# Altium PCB isa_svga.PcbDoc (part 2 of 2)
Units mm, origin at the board's own origin, x right, y up, seen from the top; angles counter-clockwise.
Board outline 104.14 x 87.63 mm, 2 copper layers (Front, Back); 62 components, 153 nets, 436 pads, 95 vias.
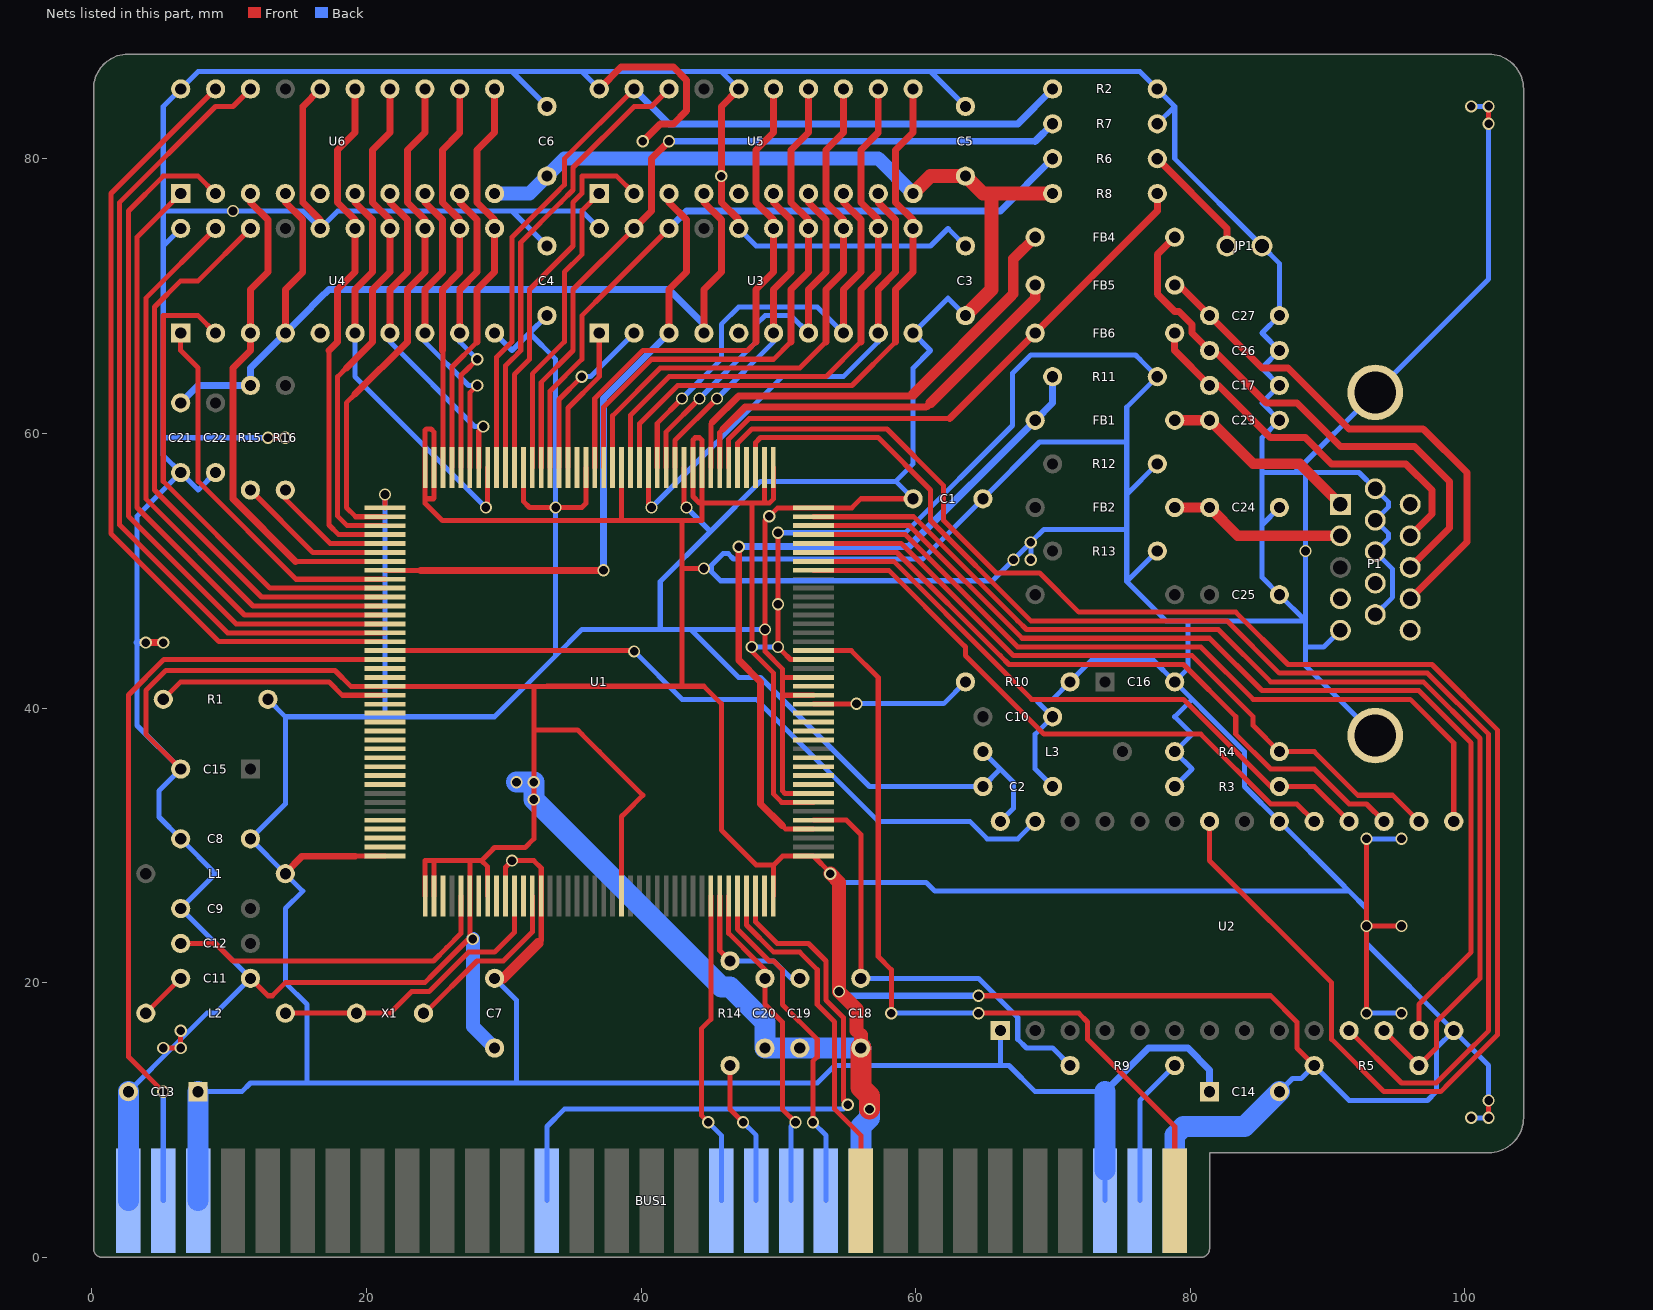
[diagram p2: the nets of this part, all layers, seen from the top]

## Via types
v1: diameter 0.889, hole 0.635, Front to Back, tented both sides, 95 vias

## Nets (pads, with @x,y where several pads share a name; then routed paths per layer and width w, separated by ;. In a path a pad name is that pad's centre, name@x,y a point inside that pad or via, vN(x,y) a via of type N, cw(c..) or ccw(c..) an arc to the next point about the centre after c; other vN are vias at no path point) (continued)
GND: BUS1.1 BUS1.10 BUS1.31 C1.2 C2.2 C3.2 C4.2 C5.2 C6.2 C7.2 C8.2 C9.2 C10.2 C11.2 C13.2 C14.2 C15.2 C16.2 C17.2 C18.2 C19.2 C20.2 C21.2 C22.2 C23.2 C24.2 C25.2 C26.2 C27.2 JP1.2 P1.5 P1.6 P1.7 P1.8 P1.10 P1.Un1 P1.Un2 R2.2 R3.2 R4.2 R5.2 R7.2 R10.2 R11.2 R12.2 R13.2 U1.1 U1.7 U1.23 U1.41 U1.42 U1.49 U1.50 U1.58 U1.79 U1.80 U1.101 U1.121 U1.122 U1.126 U1.128 U1.143 U1.160 U2.14 U2.20 U3.16 U3.20 U4.16 U4.20 U5.16 U5.20 U6.16 U6.20 | length 1092.6
  Front w0.368: v1(5.207,15.24) v1(6.477,15.24) v1(6.477,16.51) ; C15.2@6.477,35.56 3.937,38.1 3.937,41.275 5.397,42.735 17.716,42.735 18.867,41.585 U1.101@21.356,41.585 23.939,41.585 32.194,41.585 ; C11.2@11.557,20.32 12.827,19.05 13.144,19.05 14.097,20.002 24.257,20.002 24.892,20.637 27.432,23.177 v1(27.749,23.177) 27.531,23.396 U1.126@27.531,26.309 27.531,28.892 27.432,28.892 ; v1(12.827,59.69) v1(14.097,59.69) ; U1.121@24.282,26.309 24.282,28.892 24.257,28.892 24.575,28.892 24.892,28.892 ; 24.282,55.537 24.282,55.562 ; U1.122@24.933,26.309 24.933,28.892 24.892,28.892 ; U1.128@28.832,26.309 28.832,28.445 28.384,28.892 ; U1.143@38.583,26.309 38.583,31.115 38.583,31.75 38.583,32.106 38.862,32.385 40.132,33.655 36.957,36.83 35.687,38.1 35.369,38.417 32.194,38.417 ; U1.58@38.583,57.511 38.583,53.657 38.544,53.657 ; v1(44.577,50.165) 42.989,50.165 ; U1.42@48.981,57.511 48.981,54.927 49.022,54.927 ; U1.160@49.632,26.309 49.632,28.575 ; U1.41@49.632,57.511 49.632,55.22 49.34,54.927 49.022,54.927 ; v1(49.974,52.768) v1(49.974,47.561) v1(49.974,44.45) 50.292,44.133 50.889,43.536 U1.23@52.558,43.536 ; U1.7@52.558,33.137 50.249,33.137 49.657,33.729 49.657,42.545 48.387,43.815 48.069,44.133 v1(48.069,44.45) 48.069,53.657 48.069,54.927 ; v1(53.785,27.94) 53.785,28.009 U1.1@52.558,29.235 50.317,29.235 49.657,28.575 49.632,28.575 ; v1(64.579,19.05) 85.852,19.05 87.757,17.145 87.757,15.24 R5.2@89.027,13.97 ; v1(92.837,17.78) 92.837,22.86 v1(92.837,30.48) ; v1(92.837,24.13) v1(95.377,24.13) ; v1(101.727,10.16) v1(101.727,11.43) ; v1(101.727,82.55) v1(101.727,83.82) ; 24.282,55.245 24.282,54.902 25.527,53.657 37.592,53.657 38.544,53.657 ; 24.282,55.245 24.282,55.562 ; 24.282,55.245 24.892,55.245 24.933,55.286 24.933,55.603 U1.79@24.933,57.511 24.933,60.094 24.701,60.325 24.371,60.325 24.282,60.236 U1.80@24.282,57.511 24.282,55.562 ; 24.892,28.892 27.432,28.892 ; 27.432,28.892 28.384,28.892 ; 28.384,28.892 29.019,29.527 29.337,29.845 31.559,29.845 32.194,30.48 32.194,33.655 32.194,34.925 32.194,38.417 ; 32.194,38.417 32.194,40.005 32.194,41.585 ; 32.194,41.585 33.139,41.585 33.147,41.593 42.989,41.593 ; 38.544,53.657 42.989,53.657 ; 42.989,41.593 44.577,41.593 45.847,40.322 45.847,31.115 48.387,28.575 49.632,28.575 ; 42.989,41.593 42.989,50.165 ; 42.989,50.165 42.989,51.435 42.989,53.657 ; 42.989,53.657 44.259,53.657 44.432,53.657 44.432,55.245 ; 44.432,55.245 U1.49@44.432,57.511 44.432,59.517 44.259,59.69 43.942,59.69 43.782,59.53 U1.50@43.782,57.511 43.782,55.405 44.259,54.927 44.577,54.927 ; 44.432,55.245 44.432,54.927 44.577,54.927 ; 44.577,54.927 45.212,54.927 48.069,54.927 ; 48.069,54.927 48.387,54.927 49.022,54.927
  Front w0.505: v1(3.937,44.767) v1(5.207,44.767) ; U4.16@16.637,74.93 16.637,75.565 15.367,76.835 15.367,83.82 U6.16@16.637,85.09 ; U5.20@36.957,85.09 38.544,86.677 42.355,86.677 43.307,85.725 43.307,83.502 42.355,82.55 41.402,82.55 v1(40.132,81.28) ; U3.16@47.117,74.93 47.117,75.565 45.847,76.835 v1(45.847,78.74) 45.847,83.82 U5.16@47.117,85.09
  Front w0.762: 55.689,16.51 56.007,16.192
  Front w1.016: v1(53.785,27.94) 54.419,27.305 v1(54.419,19.367) 55.689,18.098 55.689,16.51 ; C18.2@56.007,15.24 56.007,16.192
  Front w1.524: C18.2@56.007,15.24 56.007,12.383 56.642,11.747 56.642,11.43 v1(56.642,10.795)
  Back w0.368: C13.2@2.667,12.065 6.159,15.557 ; v1(6.477,15.24) 6.159,15.557 ; U4.20@6.477,74.93 5.207,73.66 5.207,73.343 ; C22.2@9.017,57.15 7.747,55.88 C21.2@6.477,57.15 ; v1(12.827,59.69) 5.207,59.69 ; C4.2@33.147,73.66 30.607,76.2 ; C6.2@33.147,83.82 30.607,86.36 ; U3.20@36.957,74.93 35.687,76.2 30.607,76.2 ; U5.20@36.957,85.09 35.687,86.36 ; v1(44.577,50.165) 45.148,50.165 v1@44.895,50.165 ; U3.16@47.117,74.93 48.387,73.66 60.452,73.66 60.77,73.66 61.087,73.66 62.357,74.93 62.517,74.77 C3.2@63.627,73.66 ; U5.16@47.117,85.09 45.847,86.36 ; v1(48.069,44.45) v1(49.974,44.45) ; v1(49.974,52.768) 59.245,52.768 67.056,60.579 67.056,64.389 68.389,65.722 76.01,65.722 76.327,65.405 R11.2@77.597,64.135 75.374,61.912 75.374,59.372 ; v1(53.785,27.94) 54.419,27.305 54.742,27.305 ; 54.737,27.31 54.742,27.305 ; C5.2@63.627,83.82 61.087,86.36 ; v1(68.389,50.8) v1(68.389,52.07) ; C2.2@69.977,34.29 68.707,35.56 68.707,38.1 C10.2@69.977,39.37 69.025,40.322 68.707,40.64 69.977,40.64 R10.2@71.247,41.91 72.834,43.497 77.279,43.497 C16.2@78.867,41.91 ; R13.2@77.597,51.435 75.374,49.212 ; R12.2@77.597,57.785 75.374,55.562 ; R7.2@77.597,82.55 78.867,83.82 ; R3.2@78.867,34.29 80.137,35.56 R4.2@78.867,36.83 80.137,38.1 78.867,39.37 80.137,40.64 ; C14.2@86.487,12.065 87.439,13.018 88.075,13.018 R5.2@89.027,13.97 91.567,11.43 97.282,11.43 97.917,12.065 97.917,15.24 U2.14@99.187,16.51 ; C24.2@86.487,54.61 85.217,53.34 ; P1.5@90.932,45.664 89.718,44.45 88.392,44.45 ; v1(92.837,17.78) v1(95.377,17.78) ; P1.Un1@93.472,38.001 88.392,43.081 88.392,44.45 ; P1.10@93.472,46.81 94.742,48.08 94.742,50.119 P1.8@93.472,51.389 94.424,52.342 94.424,52.728 P1.7@93.472,53.68 94.424,54.633 94.424,55.019 P1.6@93.472,55.971 92.293,57.15 88.392,57.15 ; P1.Un2@94.292,61.719 P1.Un2@94.292,62.415 ; v1(95.377,30.48) v1(92.837,30.48) 92.837,25.4 ; v1(100.457,10.16) v1(101.727,10.16) ; v1(100.457,83.82) v1(101.727,83.82) ; v1(101.727,11.43) 101.727,13.97 U2.14@99.187,16.51 ; v1(101.727,82.55) 101.727,71.244 P1.Un2@93.472,62.989 87.633,57.15 ; 5.207,59.69 5.207,73.343 ; 5.207,59.69 5.207,58.42 C21.2@6.477,57.15 ; 5.207,73.343 5.207,76.2 ; 5.207,76.2 v1(10.287,76.2) 15.367,76.2 U4.16@16.637,74.93 17.907,76.2 30.607,76.2 ; 5.207,76.2 5.207,83.82 U6.20@6.477,85.09 7.747,86.36 30.607,86.36 ; 6.159,15.557 8.382,17.78 9.017,17.78 C11.2@11.557,20.32 C9.2@6.477,25.4 8.7,27.622 9.017,27.94 C8.2@6.477,30.48 4.889,32.067 4.889,33.972 C15.2@6.477,35.56 3.302,38.735 3.302,44.767 3.302,45.72 3.302,53.975 C21.2@6.477,57.15 ; 30.607,86.36 35.687,86.36 ; 35.687,86.36 45.847,86.36 ; 45.847,86.36 60.77,86.36 61.087,86.36 ; 54.742,27.305 59.182,27.305 60.77,27.305 61.404,26.67 91.567,26.67 ; 61.087,86.36 76.327,86.36 R2.2@77.597,85.09 78.867,83.82 ; v1(68.389,52.07) 69.342,53.023 75.374,53.023 ; v1(68.389,52.07) 68.072,51.752 67.437,51.117 v1(67.12,50.8) 65.596,49.276 45.783,49.276 45.148,49.911 45.148,50.419 45.974,51.244 46.355,51.244 46.736,50.863 60.515,50.863 C1.2@64.897,55.245 69.025,59.372 75.374,59.372 ; 75.374,49.212 75.374,53.023 ; 75.374,49.212 78.232,46.355 79.819,46.355 ; 75.374,53.023 75.374,55.562 ; 75.374,55.562 75.374,59.055 75.374,59.372 ; C16.2@78.867,41.91 79.819,42.862 79.819,46.355 ; C16.2@78.867,41.91 80.137,40.64 ; 78.867,83.82 78.867,80.01 JP1.2@85.217,73.66 86.487,72.39 C27.2@86.487,68.58 85.217,67.31 C26.2@86.487,66.04 85.217,64.77 C17.2@86.487,63.5 85.217,62.23 C23.2@86.487,60.96 85.217,59.69 ; 79.819,46.355 82.677,46.355 88.392,46.355 ; 80.137,40.64 81.407,39.37 83.947,36.83 83.947,34.29 U2.20@86.487,31.75 90.932,27.305 91.567,26.67 ; 85.217,53.34 85.217,59.69 ; 85.217,53.34 85.217,49.53 C25.2@86.487,48.26 88.392,46.355 ; 85.217,59.69 85.217,57.15 87.633,57.15 ; 87.633,57.15 88.392,57.15 ; 88.392,44.45 88.392,46.355 ; 88.392,46.355 v1(88.392,51.435) 88.392,57.15 ; 91.567,26.67 92.837,25.4 ; 92.837,25.4 v1(92.837,24.13) 92.837,22.86 U2.14@99.187,16.51
  Back w0.505: 3.302,44.767 v1(3.937,44.767) ; v1(54.419,19.367) 54.737,19.05 v1(64.579,19.05)
  Back w1.016: v1(27.749,23.177) 27.749,16.828 C7.2@29.337,15.24
  Back w1.524: BUS1.31@2.667,4.127 C13.2@2.667,12.065 ; v1(30.924,34.608) v1(32.194,34.608) v1(32.194,33.337) 45.847,19.685 46.482,19.685 49.022,17.145 C20.2@49.022,15.24 C19.2@51.562,15.24 C18.2@56.007,15.24 ; BUS1.10@56.007,4.127 56.007,9.525 56.642,10.16 v1(56.642,10.795) ; BUS1.1@78.867,4.127 78.867,8.89 79.502,9.525 83.947,9.525 C14.2@86.487,12.065
GREEN: C24.1 FB2.2 P1.2 | length 12.9
  Front w0.762: FB2.2@78.867,54.61 C24.1@81.407,54.61 83.472,52.545 P1.2@90.932,52.545
HSYNC: FB4.2 U1.48 | length 33.9
  Front w0.368: U1.48@45.082,57.511 45.082,60.703 45.209,60.83
  Front w0.508: 45.209,60.83 47.117,62.738 59.182,62.738 59.69,62.738 59.817,62.865
  Front w0.762: 59.817,62.865 66.962,70.01 67.12,70.168 67.12,72.707 FB4.2@68.707,74.295
I\O\R\: BUS1.14 U1.153 | length 23.1
  Front w0.368: 44.42,16.67 44.42,16.675 ; v1(44.895,9.842) 44.42,10.317 44.42,16.51 44.42,16.675 ; U1.153@45.082,26.309 45.082,17.338 44.42,16.675
  Back w0.368: v1(44.895,9.842) 45.847,8.89 BUS1.14@45.847,4.127
I\O\W\: BUS1.13 R14.1 | length 10.6
  Front w0.368: R14.1@46.482,13.97 46.482,10.795 v1(47.434,9.842)
  Back w0.368: v1(47.434,9.842) 48.387,8.89 BUS1.13@48.387,4.127
IOCHRDY: BUS1.41 U1.157 | length 26.7
  Front w0.368: U1.157@47.681,26.309 47.681,24.201 49.657,22.225 51.562,22.225 52.832,20.955 52.832,18.415 54.102,17.145 54.102,17.14 54.102,10.795 56.007,8.89 BUS1.41@56.007,4.127
M\E\M\R\: BUS1.12 C20.1 U1.155 | length 24.3
  Front w0.368: U1.155@46.383,26.309 46.383,23.594 48.387,21.59 49.022,20.955 C20.1@49.022,20.32 49.022,18.415 50.292,17.145 50.292,10.795 v1(51.244,9.842)
  Back w0.368: BUS1.12@50.927,4.127 50.927,9.525 v1(51.244,9.842)
M\E\M\W\: BUS1.11 U1.156 | length 25.3
  Front w0.368: U1.156@47.031,26.309 47.031,23.899 49.34,21.59 49.657,21.59 50.292,20.955 50.292,18.415 52.832,15.875 52.832,14.922 52.832,14.605 52.514,14.287 v1(52.514,9.842)
  Back w0.368: v1(52.514,9.842) 53.467,8.89 BUS1.11@53.467,4.127
MAA0: U1.52 U3.6 U5.6 | length 24
  Front w0.368: U1.52@42.481,57.511 42.481,59.499 v1(45.529,62.547)
  Front w0.505: U3.6@49.657,67.31 49.657,70.485 50.927,71.755 50.927,75.565 49.657,76.835 U5.6@49.657,77.47
  Back w0.368: v1(45.529,62.547) 49.657,66.675 U3.6@49.657,67.31
MAA1: U1.53 U3.7 U5.7 | length 29
  Front w0.368: U1.53@41.831,57.511 41.831,60.119 v1(44.259,62.547)
  Front w0.505: U3.7@52.197,67.31 52.197,70.485 53.467,71.755 53.467,75.565 52.197,76.835 U5.7@52.197,77.47
  Back w0.368: v1(44.259,62.547) 48.387,66.675 48.387,67.945 49.022,68.58 50.927,68.58 U3.7@52.197,67.31
MAA2: U1.54 U3.8 U5.8 | length 33.8
  Front w0.368: U1.54@41.181,57.511 41.181,60.739 v1(42.989,62.547)
  Front w0.505: U3.8@54.737,67.31 54.737,70.485 56.007,71.755 56.007,75.565 54.737,76.835 U5.8@54.737,77.47
  Back w0.368: v1(42.989,62.547) 45.847,65.405 45.847,67.945 47.117,69.215 52.832,69.215 U3.8@54.737,67.31
MAA3: U1.55 U3.9 U5.9 | length 36.4
  Front w0.368: U1.55@40.533,57.511 40.533,54.844 v1(40.767,54.61)
  Front w0.505: U3.9@57.277,67.31 57.277,70.485 58.547,71.755 58.547,75.565 57.277,76.835 U5.9@57.277,77.47
  Back w0.368: v1(40.767,54.61) 50.292,64.135 54.737,64.135 57.277,66.675 U3.9@57.277,67.31
MAA4: U1.56 U3.11 U5.11 | length 44.3
  Front w0.368: U1.56@39.883,57.511 39.883,60.711 42.672,63.5 52.832,63.5 55.372,63.5 58.547,66.675
  Front w0.505: 58.547,66.675 58.547,70.485 59.817,71.755 U3.11@59.817,74.93 59.817,75.565 58.547,76.835 58.547,80.645 59.817,81.915 U5.11@59.817,85.09
MAA5: U1.57 U3.12 U5.12 | length 42.8
  Front w0.368: U1.57@39.233,57.511 39.233,61.331 42.037,64.135 50.927,64.135 53.467,64.135 56.007,66.675
  Front w0.505: 56.007,66.675 56.007,70.485 57.277,71.755 U3.12@57.277,74.93 57.277,75.565 56.007,76.835 56.007,80.645 57.277,81.915 U5.12@57.277,85.09
MAA6: U1.59 U3.13 U5.13 | length 41.5
  Front w0.368: U1.59@37.932,57.511 37.932,61.3 41.402,64.77 49.022,64.77 51.562,64.77 53.467,66.675
  Front w0.505: 53.467,66.675 53.467,70.485 54.737,71.755 U3.13@54.737,74.93 54.737,75.565 53.467,76.835 53.467,80.645 54.737,81.915 U5.13@54.737,85.09
MAA7: U1.60 U3.14 U5.14 | length 40
  Front w0.368: U1.60@37.282,57.511 37.282,61.92 40.767,65.405 47.117,65.405 49.657,65.405 50.927,66.675
  Front w0.505: 50.927,66.675 50.927,70.485 52.197,71.755 U3.14@52.197,74.93 52.197,75.565 50.927,76.835 50.927,80.645 52.197,81.915 U5.14@52.197,85.09
MAA8: U1.61 U3.15 U5.15 | length 38.5
  Front w0.368: U1.61@36.632,57.511 36.632,62.54 40.132,66.04 47.752,66.04 48.387,66.675
  Front w0.505: 48.387,66.675 48.387,70.485 49.657,71.755 U3.15@49.657,74.93 49.657,75.565 48.387,76.835 48.387,80.645 49.657,81.915 U5.15@49.657,85.09
MAB0: U1.73 U4.6 U6.6 | length 30.8
  Front w0.368: v1(28.702,54.61) 28.832,54.74 U1.73@28.832,57.511
  Front w0.505: U4.6@19.177,67.31 19.177,70.485 20.447,71.755 20.447,75.565 19.177,76.835 U6.6@19.177,77.47
  Back w0.368: U4.6@19.177,67.31 19.177,64.135 v1(28.702,54.61)
MAB1: U1.74 U4.7 U6.7 | length 24.3
  Front w0.368: U1.74@28.181,57.511 28.181,60.185 v1(28.511,60.515)
  Front w0.505: U4.7@21.717,67.31 21.717,70.485 22.987,71.755 22.987,75.565 21.717,76.835 U6.7@21.717,77.47
  Back w0.368: U4.7@21.717,67.31 21.717,66.675 27.877,60.515 v1(28.511,60.515)
MAB2: U1.75 U4.8 U6.8 | length 23.2
  Front w0.368: U1.75@27.531,57.511 27.531,62.964 v1(28.067,63.5)
  Front w0.505: U4.8@24.257,67.31 24.257,70.485 25.527,71.755 25.527,75.565 24.257,76.835 U6.8@24.257,77.47
  Back w0.368: U4.8@24.257,67.31 24.257,66.675 27.432,63.5 v1(28.067,63.5)
MAB3: U1.76 U4.9 U6.9 | length 22
  Front w0.368: U1.76@26.881,57.511 26.881,64.219 27.432,64.77 27.749,65.087 v1(28.067,65.405)
  Front w0.505: U4.9@26.797,67.31 26.797,70.485 28.067,71.755 28.067,75.565 26.797,76.835 U6.9@26.797,77.47
  Back w0.368: U4.9@26.797,67.31 26.797,66.675 v1(28.067,65.405)
MAB4: U1.77 U4.11 U6.11 | length 29.9
  Front w0.368: U1.77@26.233,57.511 26.233,64.841 28.067,66.675
  Front w0.505: 28.067,66.675 28.067,70.485 29.337,71.755 29.337,73.025 U4.11@29.337,74.93 29.337,75.565 28.067,76.835 28.067,80.645 29.337,81.915 U6.11@29.337,85.09
MAB5: U1.78 U4.12 U6.12 | length 29.2
  Front w0.368: 25.527,66.04 25.583,65.984 U1.78@25.583,57.511
  Front w0.505: 25.527,66.04 25.527,70.485 26.797,71.755 U4.12@26.797,74.93 26.797,75.565 25.527,76.835 25.527,80.645 26.797,81.915 U6.12@26.797,85.09
MAB6: U1.82 U4.13 U6.13 | length 37
  Front w0.368: 19.177,62.865 18.542,62.23 18.542,60.96 18.542,54.61 19.218,53.934 U1.82@21.356,53.934
  Front w0.505: 19.177,62.865 22.987,66.675 22.987,70.485 24.257,71.755 U4.13@24.257,74.93 24.257,75.565 22.987,76.835 22.987,80.645 24.257,81.915 U6.13@24.257,85.09
MAB7: U1.83 U4.14 U6.14 | length 37.5
  Front w0.368: 18.542,64.77 17.907,64.135 17.907,62.865 17.907,53.975 18.598,53.284 U1.83@21.356,53.284
  Front w0.505: 18.542,64.77 20.447,66.675 20.447,70.485 21.717,71.755 U4.14@21.717,74.93 21.717,75.565 20.447,76.835 20.447,80.645 21.717,81.915 U6.14@21.717,85.09
MAB8: U1.84 U4.15 U6.15 | length 38
  Front w0.368: 17.272,66.04 17.272,53.34 17.978,52.634 U1.84@21.356,52.634
  Front w0.505: 17.272,66.04 17.907,66.675 17.907,70.485 19.177,71.755 U4.15@19.177,74.93 19.177,75.565 17.907,76.835 17.907,80.645 19.177,81.915 U6.15@19.177,85.09
MD0: U1.64 U3.1 | length 10.7
  Front w0.368: U1.64@34.681,57.511 34.681,59.69 34.681,59.954 34.681,61.595 34.681,61.859 36.957,64.135 36.957,65.405 U3.1@36.957,67.31
MD1: U1.65 U3.2 | length 12.4
  Front w0.368: U1.65@34.031,57.511 34.031,60.325 34.031,61.595 34.031,62.479 v1(35.687,64.135)
  Back w0.368: v1(35.687,64.135) 36.322,64.135 37.592,65.405 U3.2@39.497,67.31
MD2: R6.1 U1.66 U3.18 | length 51
  Front w0.368: U1.66@33.381,57.511 33.381,60.325 33.381,60.96 33.381,62.23 33.381,63.099 35.687,65.405 35.687,66.675 35.687,67.31 35.687,68.58 37.592,70.485 U3.18@42.037,74.93
  Back w0.505: U3.18@42.037,74.93 43.307,76.2 66.167,76.2
  Back w0.508: 66.167,76.2 R6.1@69.977,80.01
MD3: R7.1 U1.67 U3.19 | length 56.1
  Front w0.368: U1.67@32.733,57.511 32.733,61.595 32.733,62.865 32.733,63.721 35.052,66.04 35.052,67.31 35.052,70.485 U3.19@39.497,74.93
  Front w0.505: U3.19@39.497,74.93 40.767,76.2 40.767,80.01 v1(42.037,81.28)
  Back w0.505: v1(42.037,81.28) 68.707,81.28
  Back w0.508: 68.707,81.28 R7.1@69.977,82.55
MD4: U1.68 U5.1 | length 22
  Front w0.368: U1.68@32.083,57.511 32.083,63.5 32.083,64.341 34.417,66.675 34.417,67.945 34.417,71.755 35.687,73.025 35.687,74.295 35.687,75.565 35.687,76.2 U5.1@36.957,77.47
MD5: U1.70 U5.2 | length 27.6
  Front w0.368: U1.70@30.782,57.511 30.782,61.595 30.782,62.23 30.782,62.865 30.782,64.31 31.242,64.77 31.877,65.405 31.877,66.675 31.877,70.485 35.052,73.66 35.052,74.93 35.052,76.835 35.687,77.47 35.687,78.74 38.227,78.74 U5.2@39.497,77.47
MD6: U1.71 U5.18 | length 33.3
  Front w0.368: U1.71@30.132,57.511 30.132,62.865 30.132,64.135 30.132,64.93 30.607,65.405 30.612,65.405 31.242,66.035 31.242,72.39 31.242,73.66 31.242,73.914 34.163,76.835 35.052,77.724 35.052,79.375 39.497,83.82 40.767,83.82 U5.18@42.037,85.09
MD7: R2.1 U1.72 U5.19 | length 64.3
  Front w0.368: U1.72@29.482,57.511 29.482,64.77 29.482,65.55 30.607,66.675 30.607,73.025 30.607,74.295 33.782,77.47 34.417,78.105 34.417,80.01 U5.19@39.497,85.09
  Back w0.505: U5.19@39.497,85.09 42.037,82.55 67.437,82.55
  Back w0.508: 67.437,82.55 R2.1@69.977,85.09
MD16: U1.89 U4.1 | length 27.9
  Front w0.368: U4.1@6.477,67.31 6.477,66.04 7.747,64.77 7.747,56.515 14.877,49.385 U1.89@21.356,49.385
MD17: U1.90 U4.2 | length 35.8
  Front w0.368: U4.2@9.017,67.31 7.747,68.58 5.207,68.58 5.207,56.515 12.987,48.735 U1.90@21.356,48.735
MD18: U1.91 U4.18 | length 42.7
  Front w0.368: U4.18@11.557,74.93 7.747,71.12 6.477,71.12 4.572,69.215 4.572,55.88 12.367,48.085 U1.91@21.356,48.085
MD19: U1.92 U4.19 | length 42.4
  Front w0.368: U4.19@9.017,74.93 3.937,69.85 3.937,55.245 11.747,47.434 U1.92@21.356,47.434
MD20: U1.93 U6.1 | length 45.5
  Front w0.368: U6.1@6.477,77.47 3.302,74.295 3.302,54.61 11.128,46.784 U1.93@21.356,46.784
MD21: U1.94 U6.2 | length 52.1
  Front w0.368: U6.2@9.017,77.47 7.747,78.74 5.207,78.74 2.667,76.2 2.667,53.975 10.508,46.134 U1.94@21.356,46.134
MD22: U1.95 U6.18 | length 59
  Front w0.368: U6.18@11.557,85.09 10.287,83.82 9.017,83.82 2.032,76.835 2.032,53.34 9.888,45.484 U1.95@21.356,45.484
MD23: U1.96 U6.19 | length 58.8
  Front w0.368: U6.19@9.017,85.09 1.397,77.47 1.397,52.705 9.266,44.836 U1.96@21.356,44.836
MONITOR: FB6.2 R8.1 U1.46 | length 41.4
  Front w0.368: U1.46@46.383,57.511 46.383,59.591 47.117,60.325 47.434,60.642 47.879,61.087 62.484,61.087
  Front w0.508: 62.484,61.087 FB6.2@68.707,67.31 77.597,76.2 R8.1@77.597,77.47
N\M\I\: BUS1.32 U1.24 | length 60.6
  Front w0.368: U1.24@52.558,44.186 54.102,44.186 55.319,44.186 57.277,42.227 57.277,21.907 58.229,20.955 v1(58.229,17.78) ; v1(64.579,17.78) 71.882,17.78 72.517,17.145 72.517,15.875 78.867,9.525 BUS1.32@78.867,4.127
  Back w0.368: v1(58.229,17.78) v1(64.579,17.78)
Net-(C11-Pad1): C11.1 L2.1 | length 3.6
  Front w0.368: L2.1@3.937,17.78 C11.1@6.477,20.32
Net-(C12-Pad2): C12.2 U1.125 | length 24.5
  Front w0.368: C12.2@6.477,22.86 9.017,22.86 10.287,21.59 24.892,21.59 25.85,22.548 26.881,23.579 U1.125@26.881,26.309
Net-(C17-Pad1): C17.1 FB6.1 P1.12 | length 28.2
  Front w0.508: FB6.1@78.867,67.31 78.867,66.04 C17.1@81.407,63.5 82.042,63.5 85.852,59.69 88.392,59.69 90.297,57.785 95.694,57.785 97.599,55.88 97.599,54.292 97.599,54.132 P1.12@96.012,52.545
Net-(C18-Pad1): C18.1 R9.2 U1.5 | length 33.2
  Front w0.368: U1.5@52.558,31.836 54.737,31.836 54.968,31.836 56.007,30.797 C18.1@56.007,20.32
  Back w0.368: C18.1@56.007,20.32 64.579,20.32 67.437,17.462 67.437,15.875 68.072,15.24 69.342,15.24 69.977,15.24 R9.2@71.247,13.97
Net-(C19-Pad1): C19.1 R14.2 U1.154 | length 10.6
  Front w0.368: U1.154@45.733,26.309 45.733,22.339 R14.2@46.482,21.59
  Back w0.368: R14.2@46.482,21.59 49.657,21.59 50.927,20.32 C19.1@51.562,20.32
Net-(C26-Pad1): C26.1 FB4.1 P1.13 | length 39.4
  Front w0.508: FB4.1@78.867,74.295 77.597,73.025 77.597,70.168 78.867,68.897 79.184,68.897 80.137,67.945 80.137,67.31 80.772,66.675 C26.1@81.407,66.04 81.724,66.04 85.534,62.23 87.757,62.23 90.932,59.055 96.329,59.055 98.87,56.515 98.87,53.104 P1.13@96.012,50.246
Net-(C27-Pad1): C27.1 FB5.1 P1.14 | length 37.8
  Front w0.508: FB5.1@78.867,70.802 79.184,70.802 C27.1@81.407,68.58 85.217,64.77 87.122,64.77 91.567,60.325 96.965,60.325 100.139,57.15 100.139,52.083 P1.14@96.012,47.955
Net-(JP1-Pad1): JP1.1 R6.2 | length 8.5
  Front w0.508: R6.2@77.597,80.01 82.677,74.93 JP1.1@82.677,73.66
Net-(L2-Pad2): L2.2 U1.131 X1.2 | length 21.8
  Front w0.368: L2.2@14.097,17.78 X1.2@19.276,17.78 21.717,17.78 23.304,19.367 24.575,19.367 27.432,22.225 29.337,22.225 29.972,22.86 30.29,23.177 30.782,23.67 U1.131@30.782,26.309
Net-(P1-Pad4): P1.4
Net-(P1-Pad9): P1.9
Net-(P1-Pad11): P1.11
Net-(P1-Pad15): P1.15
Net-(R1-Pad1): R1.1 U1.102 | length 17.1
  Front w0.368: R1.1@5.207,40.64 6.477,41.91 17.272,41.91 18.247,40.935 U1.102@21.356,40.935
Net-(R10-Pad1): R10.1 U1.18 | length 11.8
  Front w0.368: U1.18@52.558,40.287 v1@55.654,40.287 ; v1@55.654,40.287 v1(55.689,40.322) v1@55.654,40.287
  Back w0.368: v1(55.689,40.322) 62.039,40.322 R10.1@63.627,41.91
Net-(R15-Pad1): R15.1 U1.86 | length 11.7
  Front w0.368: R15.1@11.557,55.88 16.101,51.336 16.637,51.336 U1.86@21.356,51.336
Net-(R16-Pad1): R16.1 U1.85 | length 9.2
  Front w0.368: R16.1@14.097,55.88 14.097,55.245 17.358,51.984 U1.85@21.356,51.984
Net-(U1-Pad9): U1.9
Net-(U1-Pad10): U1.10
Net-(U1-Pad11): U1.11
Net-(U1-Pad12): U1.12
Net-(U1-Pad14): U1.14
Net-(U1-Pad15): U1.15
Net-(U1-Pad16): U1.16
Net-(U1-Pad17): U1.17
Net-(U1-Pad20): U1.20
Net-(U1-Pad44): U1.44
Net-(U1-Pad63): U1.63
Net-(U1-Pad99): U1.99
Net-(U1-Pad100): U1.100
Net-(U1-Pad103): U1.103
Net-(U1-Pad104): U1.104
Net-(U1-Pad105): U1.105
Net-(U1-Pad106): U1.106
Net-(U1-Pad107): U1.107
Net-(U1-Pad108): U1.108
Net-(U1-Pad109): U1.109
Net-(U1-Pad110): U1.110
Net-(U1-Pad111): U1.111
Net-(U1-Pad112): U1.112
Net-(U1-Pad116): U1.116
Net-(U1-Pad117): U1.117
Net-(U1-Pad118): U1.118
Net-(U1-Pad119): U1.119
Net-(U1-Pad123): U1.123
Net-(U1-Pad127): U1.127
Net-(U1-Pad129): U1.129
Net-(U1-Pad132): U1.132
Net-(U1-Pad133): U1.133 X1.1 | length 13
  Front w0.368: X1.1@24.158,17.78 24.252,17.78 28.062,21.59 ; U1.133@32.083,26.309 32.083,23.701 30.607,22.225 30.29,21.907 29.972,21.59 28.062,21.59 ; 28.062,21.59 28.062,21.595 28.062,21.59
Net-(U1-Pad159): U1.159
Net-(U3-Pad5): U3.5
Net-(U4-Pad5): U4.5
Net-(U5-Pad5): U5.5
Net-(U6-Pad5): U6.5
OSC: BUS1.30 U1.98 | length 57.6
  Front w0.368: v1(5.207,12.065) 2.667,14.605 2.667,40.957 5.245,43.536 U1.98@21.356,43.536
  Back w0.368: BUS1.30@5.207,4.127 v1(5.207,12.065)
R: FB1.1 R11.1 U1.4 | length 53.1
  Front w0.368: 50.292,31.432 50.538,31.186 U1.4@52.558,31.186
  Front w0.505: v1(47.117,51.752) 47.117,43.497 48.704,41.91
  Front w0.508: 48.704,41.91 48.704,33.02 50.292,31.432
  Back w0.508: v1(47.117,51.752) 58.864,51.752 59.499,51.752 FB1.1@68.707,60.96 69.977,62.23 R11.1@69.977,64.135
R\A\S\: C21.1 R15.2 U3.4 U4.4 U5.4 U6.4 | length 66.4
  Front w0.368: U5.4@44.577,76.835 U5.4@44.577,77.47
  Front w0.505: U4.4@14.097,67.31 14.097,70.485 15.367,71.755 15.367,75.565 14.097,76.835 U6.4@14.097,77.47 ; U3.4@44.577,67.31 44.577,70.485 45.847,71.755 45.847,75.565 U5.4@44.577,76.835
  Back w0.505: C21.1@6.477,62.23 7.747,63.5 R15.2@11.557,63.5 11.557,64.77 U4.4@14.097,67.31 15.367,68.58 16.637,69.85 17.272,70.485 40.767,70.485 42.037,70.485 44.577,67.945 U3.4@44.577,67.31
R\E\F\R\E\S\H\: BUS1.19 U1.158 | length 47.3
  Front w0.368: U1.158@48.331,26.309 48.331,24.44 49.911,22.86 51.88,22.86 52.197,22.86 53.467,21.59 53.467,18.727 54.732,17.462 54.737,17.462 54.737,11.435 54.732,11.43 54.737,11.43 v1(55.054,11.112)
  Back w0.368: BUS1.19@33.147,4.127 33.147,9.525 34.417,10.795 54.737,10.795 v1(55.054,11.112)
R\O\M\C\S\: U1.45 U2.22 | length 125.3
  Front w0.368: U1.45@47.033,57.511 47.033,59.294 48.067,60.328 ; 48.069,60.33 48.067,60.328 ; U2.22@81.407,31.75 81.407,28.892 90.297,20.002 90.297,15.875 94.107,12.065 98.234,12.065 98.87,12.7 100.139,13.97 102.362,16.192 102.362,38.417 97.599,43.18 87.122,43.18 83.312,46.99 ; 83.307,46.985 83.312,46.99 ; 48.067,60.328 57.909,60.328 57.912,60.33 57.912,60.325 62.039,56.197 62.039,53.657 65.849,49.847 69.025,49.847 71.882,46.99 83.312,46.99
RED: C23.1 FB1.2 P1.1 | length 14.6
  Front w0.762: FB1.2@78.867,60.96 C23.1@81.407,60.96 84.582,57.785 87.983,57.785 P1.1@90.932,54.836
RESET: BUS1.2 R9.1 | length 10.9
  Back w0.368: BUS1.2@76.327,4.127 76.327,11.43 R9.1@78.867,13.97
RMD0: U1.43 U2.11 | length 100.5
  Front w0.368: U1.43@48.331,57.511 48.331,59.327 48.704,59.7 57.267,59.7 61.087,55.88 61.087,53.657 67.754,46.99 68.389,46.355 82.677,46.355 86.487,42.545 97.282,42.545 101.727,38.1 101.727,16.51 99.827,14.61 97.917,12.7 95.377,12.7 U2.11@91.567,16.51
RMD1: R5.1 U1.39 U2.12 | length 84.5
  Front w0.368: U1.39@52.558,53.937 59.855,53.937 67.437,46.355 68.072,45.72 82.042,45.72 85.852,41.91 96.965,41.91 101.092,37.782 101.092,20.32 97.917,17.145 97.917,15.24 R5.1@96.647,13.97 U2.12@94.107,16.51
RMD2: U1.38 U2.13 | length 81.5
  Front w0.368: U1.38@52.558,53.287 59.499,53.287 ; U2.13@96.647,16.51 96.647,18.415 100.457,22.225 100.457,37.465 ; 97.282,40.64 100.457,37.465 ; 59.499,53.287 59.553,53.287 ; 59.499,53.287 59.553,53.287 ; 59.553,53.287 67.754,45.085 81.407,45.085 85.217,41.275 96.647,41.275 100.457,37.465
RMD3: U1.37 U2.15 | length 58.6
  Front w0.368: U1.37@52.558,52.636 59.251,52.636 66.802,45.085 67.437,44.45 80.772,44.45 84.582,40.64 96.012,40.64 99.187,37.465 U2.15@99.187,31.75
RMD4: R4.1 U1.36 U2.16 | length 52.8
  Front w0.368: U1.36@52.558,51.986 58.948,51.986 66.484,44.45 67.12,43.815 80.137,43.815 84.582,39.37 84.582,38.735 R4.1@86.487,36.83 89.027,36.83 92.202,33.655 94.742,33.655 U2.16@96.647,31.75
RMD5: U1.35 U2.17 | length 50.4
  Front w0.368: U1.35@52.558,51.336 58.646,51.336 66.167,43.815 66.802,43.18 79.502,43.18 83.312,39.37 83.312,38.1 85.852,35.56 89.027,35.56 91.567,33.02 92.837,33.02 U2.17@94.107,31.75
RMD6: R3.1 U1.34 U2.18 | length 46.9
  Front w0.368: U1.34@52.558,50.686 58.407,50.686 65.913,43.18 68.453,40.64 79.502,40.64 85.852,34.29 R3.1@86.487,34.29 89.027,34.29 U2.18@91.567,31.75
RMD7: U1.33 U2.19 | length 44.4
  Front w0.368: U1.33@52.558,50.035 57.277,50.035 57.912,50.035 58.042,50.035 63.309,44.767 63.627,44.45 63.627,43.815 69.183,38.259 69.342,38.1 80.772,38.1 85.852,33.02 87.757,33.02 U2.19@89.027,31.75
ROMA0: U1.97 U2.27 | length 53.6
  Front w0.368: U1.97@21.356,44.186 38.174,44.186 38.227,44.186 39.444,44.186 v1(39.497,44.133)
  Back w0.368: v1(39.497,44.133) 42.989,40.64 48.387,40.64 49.34,39.688 57.277,31.75 63.944,31.75 65.215,30.48 67.437,30.48 U2.27@68.707,31.75
VCC: BUS1.3 BUS1.29 C1.1 C2.1 C3.1 C4.1 C5.1 C6.1 C7.1 C8.1 C13.1 C14.1 L1.1 L3.1 R1.2 R8.2 U1.8 U1.19 U1.21 U1.40 U1.51 U1.62 U1.69 U1.81 U1.120 U1.130 U1.134 U2.1 U2.28 U3.10 U4.10 U5.10 U6.10 | length 431.3
  Front w0.368: 19.177,29.21 19.202,29.235 U1.120@21.356,29.235 ; U1.81@21.356,54.585 v1(21.356,55.562) ; C7.1@29.337,20.32 C7.1@29.972,20.32 ; U1.130@30.132,26.309 30.132,28.418 v1(30.607,28.892) 31.242,28.892 32.194,28.892 32.733,28.354 U1.134@32.733,26.309 32.733,23.081 32.512,22.86 ; U1.69@31.432,57.511 31.432,55.054 31.877,54.61 v1(33.782,54.61) 35.687,54.61 35.982,54.905 U1.62@35.982,57.511 ; U1.51@43.132,57.511 43.132,54.785 v1(43.307,54.61) ; U1.8@52.558,33.785 50.49,33.785 50.292,33.983 50.292,40.957 ; U1.19@52.558,40.935 50.292,40.935 50.292,40.957 ; U1.21@52.558,42.235 50.292,42.235 50.292,42.227 ; C1.1@59.817,55.245 56.007,55.245 55.347,54.585 55.054,54.585 U1.40@52.558,54.585 49.949,54.585 v1(49.34,53.975) 49.022,53.657 v1(49.022,45.72) 49.022,44.133 50.292,42.862 50.292,42.227 ; 50.292,40.957 50.292,42.227
  Front w0.508: L1.1@14.097,27.94 14.097,27.991 15.316,29.21 19.177,29.21
  Front w0.762: C7.1@29.337,20.32 29.972,20.32 32.512,22.86
  Front w1.016: U5.10@59.817,77.47 61.087,78.74 C5.1@63.627,78.74 64.897,77.47 65.532,77.47 ; C3.1@63.627,68.58 65.532,70.485 65.532,77.47 ; R8.2@69.977,77.47 65.532,77.47
  Back w0.368: C13.1@7.747,12.065 10.922,12.065 11.557,12.7 15.684,12.7 ; R1.2@12.827,40.64 14.097,39.37 ; 15.684,16.828 15.684,17.462 ; v1(21.356,55.562) 21.356,39.413 21.399,39.37 ; C7.1@29.337,20.32 30.924,18.732 30.924,12.7 ; U4.10@29.337,67.31 30.607,66.04 31.877,67.31 ; C4.1@33.147,68.58 31.877,67.31 ; v1(43.307,54.61) 45.055,52.862 ; 44.895,53.023 45.055,52.862 ; v1(49.022,45.72) 43.624,45.72 ; C1.1@59.817,55.245 58.547,56.515 ; C3.1@63.627,68.58 62.357,69.85 U3.10@59.817,67.31 61.087,66.04 59.817,64.77 59.817,57.785 58.547,56.515 ; L3.1@64.897,36.83 66.167,35.56 ; U2.1@66.167,16.51 66.167,13.97 ; U2.28@66.167,31.75 67.12,32.703 67.12,34.608 66.167,35.56 ; BUS1.3@73.787,4.127 BUS1.3@73.787,6.35 ; 73.787,12.065 68.707,12.065 66.802,13.97 66.167,13.97 ; 14.097,39.37 21.399,39.37 ; 14.097,39.37 14.097,33.02 C8.1@11.557,30.48 L1.1@14.097,27.94 15.367,26.67 14.097,25.4 14.097,20.002 15.684,18.415 15.684,17.462 ; 15.684,12.7 15.684,17.462 ; 15.684,12.7 30.924,12.7 ; 21.399,39.37 29.337,39.37 33.782,43.815 ; 30.924,12.7 52.832,12.7 53.467,13.335 54.102,13.97 60.134,13.97 66.167,13.97 ; 31.877,67.31 33.782,65.405 v1(33.782,54.61) 33.782,43.815 ; 33.782,43.815 35.687,45.72 41.402,45.72 ; 41.402,45.72 41.402,48.578 41.402,49.212 45.052,52.862 45.055,52.862 ; 41.402,45.72 43.624,45.72 ; 43.624,45.72 47.117,42.227 48.704,42.227 56.642,34.29 C2.1@64.897,34.29 66.167,35.56 ; 45.055,52.862 48.704,56.512 48.704,56.515 49.34,56.515 57.912,56.515 58.547,56.515
  Back w0.505: 73.787,12.065 76.962,15.24 79.819,15.24 81.407,13.652 C14.1@81.407,12.065
  Back w1.016: U6.10@29.337,77.47 31.877,77.47 C6.1@33.147,78.74 34.417,80.01 57.277,80.01 U5.10@59.817,77.47
  Back w1.524: BUS1.29@7.747,4.127 C13.1@7.747,12.065 ; BUS1.3@73.787,6.35 73.787,12.065
VSYNC: FB5.2 U1.47 | length 30.5
  Front w0.368: U1.47@45.733,57.511 45.733,60.084 45.974,60.325
  Front w0.508: 45.974,60.325 47.561,61.912 47.625,61.912 60.77,61.912 61.087,62.23
  Front w0.762: 61.087,62.23 65.215,66.358 68.707,69.85 FB5.2@68.707,70.802
W\E\0\: U1.88 U3.3 U5.3 | length 46.4
  Front w0.368: U1.88@21.356,50.035 23.939,50.035 ; U5.3@42.037,76.835 U5.3@42.037,77.47
  Front w0.505: U3.3@42.037,67.31 42.037,70.485 43.307,71.755 43.307,75.565 U5.3@42.037,76.835
  Front w0.508: 23.939,50.035 v1(37.274,50.035)
  Back w0.508: v1(37.274,50.035) 37.274,62.547 U3.3@42.037,67.31
W\E\2\: U1.87 U4.3 U6.3 | length 36.8
  Front w0.368: 14.846,50.686 U1.87@21.356,50.686
  Front w0.505: 10.287,55.245 10.287,64.77 11.557,66.04 U4.3@11.557,67.31 11.557,70.485 12.827,71.755 12.827,75.565 11.557,76.835 U6.3@11.557,77.47
  Front w0.508: 10.287,55.245 14.846,50.686
copper on no net: | length 4.3
  Front w0.368: v1(63.627,58.42) v1(63.627,59.69) 64.897,58.42
  Back w0.368: v1(63.627,59.69) v1(64.897,59.69)

## Polygon pours and split planes (outlines as drawn)
GND on Front "Front-GND" (solid, remove dead copper, pour order 0): 104.267,7.62 104.267,87.63 0.127,87.63 0.127,9.207 81.407,9.207 81.407,7.62
GND on Back "Back-GND" (solid, remove dead copper, pour order 2): 104.267,7.62 104.267,87.63 0.127,87.63 0.127,9.207 5.842,9.207 5.842,13.018 12.827,20.002 12.827,25.717 12.509,26.035 10.604,26.035 9.652,26.987 9.652,41.275 16.637,48.26 16.637,70.802 17.907,72.072 64.897,72.072 66.167,70.802 66.167,66.675 62.039,62.547 62.039,55.562 59.182,53.023 46.482,53.023 43.942,50.482 43.942,48.26 44.895,47.307 66.802,47.307 68.072,46.038 68.072,16.192 82.042,16.192 82.995,15.24 82.995,10.795 82.677,10.477 78.549,10.477 78.232,10.16 78.232,9.207 81.407,9.207 81.407,7.62
VCC on Back "Back-VCC" (solid, remove dead copper, pour order 1): 77.597,9.207 77.597,10.477 78.232,11.112 82.359,11.112 82.359,14.922 81.724,15.557 67.437,15.557 67.437,45.72 66.484,46.672 44.577,46.672 43.307,47.942 43.307,50.8 46.164,53.657 59.182,53.657 61.404,55.88 61.404,62.865 65.532,66.992 65.532,70.485 64.579,71.438 18.224,71.438 17.272,70.485 17.272,47.942 10.287,40.957 10.287,27.305 10.922,26.67 12.827,26.67 13.462,26.035 13.462,19.685 6.477,12.7 6.477,9.207

## Keep-outs
Edge.Cuts:
  lines w0.381: 0.127,0.635 ccw(c0.762,0.635) 0.762,0 ; 0.127,0.635 ccw(c0.762,0.635) 0.762,0 ; 0.127,0.635 0.127,85.09 ; 0.127,0.635 0.127,85.09 ; 0.127,85.09 cw(c2.667,85.09) 2.667,87.63 ; 0.127,85.09 cw(c2.667,85.09) 2.667,87.63 ; 0.762,0 80.772,0 ; 0.762,0 80.772,0 ; 2.667,87.63 101.727,87.63 ; 2.667,87.63 101.727,87.63 ; 80.772,0 ccw(c80.772,0.635) 81.407,0.635 ; 80.772,0 ccw(c80.772,0.635) 81.407,0.635 ; 81.407,0.635 81.407,7.62 ; 81.407,0.635 81.407,7.62 ; 81.407,7.62 101.727,7.62 ; 81.407,7.62 101.727,7.62 ; 101.727,7.62 ccw(c101.727,10.16) 104.267,10.16 ; 101.727,7.62 ccw(c101.727,10.16) 104.267,10.16 ; 101.727,87.63 cw(c101.727,85.09) 104.267,85.09 ; 101.727,87.63 cw(c101.727,85.09) 104.267,85.09 ; 104.267,10.16 104.267,85.09 ; 104.267,10.16 104.267,85.09

## Silkscreen, mask and mechanical layers (free items; w line width, h text height)
F.SilkS:
  lines w0.254: 37.274,15.24 38.544,13.97 ; 39.179,14.605 40.45,13.335 ; 37.274,14.605 38.544,13.335 ; 37.274,14.605 36.005,13.335 34.734,13.335 37.274,15.875 ; 37.274,14.605 37.274,15.875 ; 37.274,15.875 38.544,14.605 ; 38.544,13.335 39.179,13.97 ; 38.544,13.335 38.544,14.605 ; 38.544,14.605 39.179,15.24 ; 39.179,13.97 39.814,13.335 41.084,13.335 39.179,15.24 ; 39.179,13.97 39.179,15.24
  text "ISA Super VGA / Version 1.1 / Copyright (C) 2017 / Sergey Kiselev" at 81.177,75.394 h1.52
  text "JP1: Select monitor's / horizontal frequency: / Open: >= 48.7 kHz / Closed: < 48.7 kHz" at 2.349,44.836 h1.02
  text "www.malinov.com" at 30.457,11.197 h1.27

## Text inside footprints (layer, text, board x,y; h text height)
C13: F.SilkS "+" at 7.108,8.886 h1.02
C14: F.SilkS "+" at 80.768,13.966 h1.02
C15: F.SilkS "+" at 10.918,32.381 h1.02
C16: F.SilkS "+" at 73.148,43.811 h1.02
U1: F.SilkS "1" at 53.269,27.936 h1.02 r90; F.SilkS "160" at 48.317,21.514 h1.02; F.SilkS "40" at 57.493,53.591 h1.02 r90; F.SilkS "10" at 57.493,34.171 h1.02 r90; F.SilkS "20" at 57.493,40.591 h1.02 r90; F.SilkS "30" at 57.493,47.091 h1.02 r90; F.SilkS "41" at 51.643,56.734 h1.02 r90; F.SilkS "81" at 22.067,55.434 h1.02 r90; F.SilkS "121" at 24.018,25.16 h1.02 r90; F.SilkS "50" at 44.493,61.066 h1.02 r90; F.SilkS "60" at 37.993,61.092 h1.02 r90; F.SilkS "70" at 31.493,61.066 h1.02 r90; F.SilkS "80" at 24.993,61.066 h1.02 r90; F.SilkS "90" at 18.169,47.741 h1.02 r90; F.SilkS "100" at 18.169,40.869 h1.02 r90; F.SilkS "110" at 18.169,34.449 h1.02 r90; F.SilkS "120" at 18.169,27.869 h1.02 r90; F.SilkS "130" at 28.923,21.514 h1.02; F.SilkS "140" at 37.343,20.069 h1.02 r90; F.SilkS "150" at 43.843,20.069 h1.02 r90